# EAGLE board relay driver (EAGLE 7.1.0)
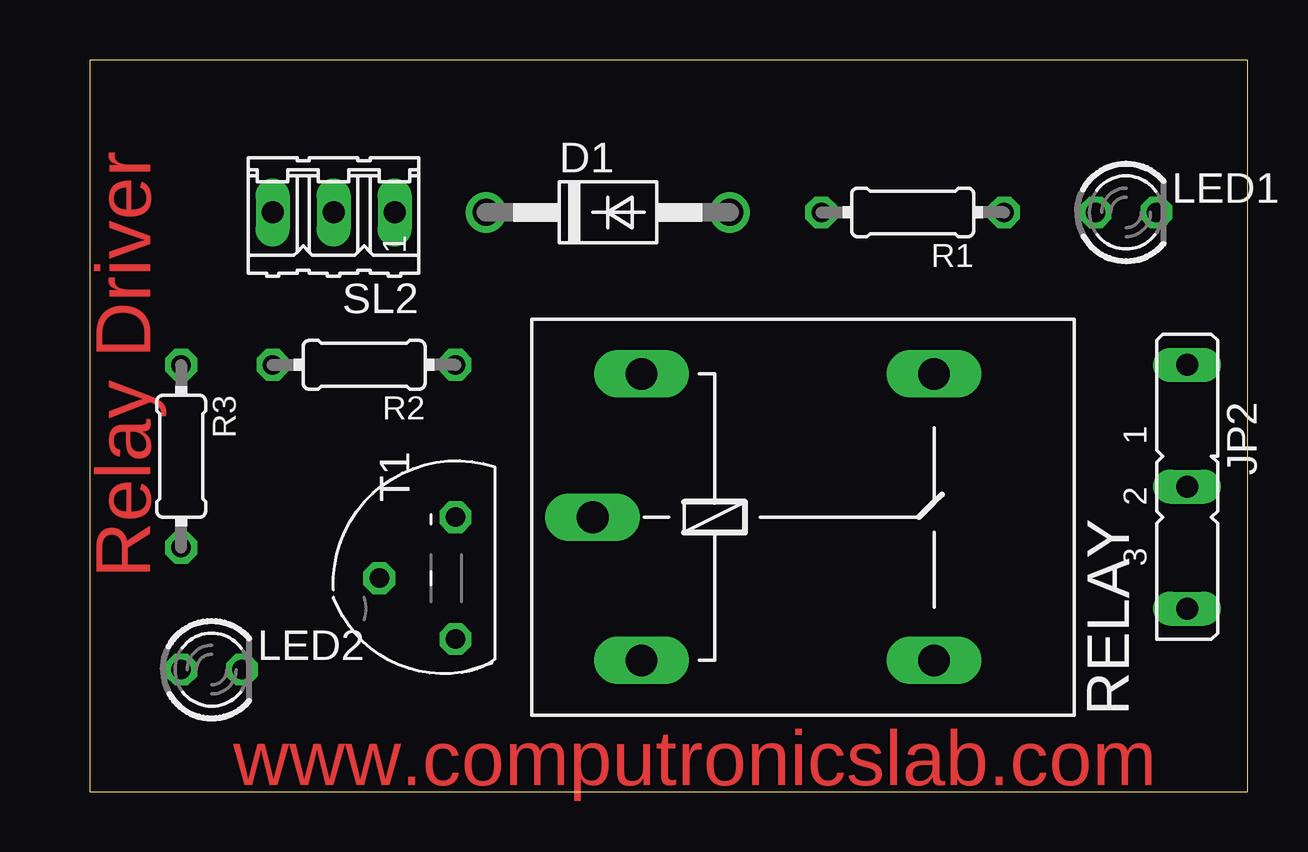
[diagram p0: board, top side]
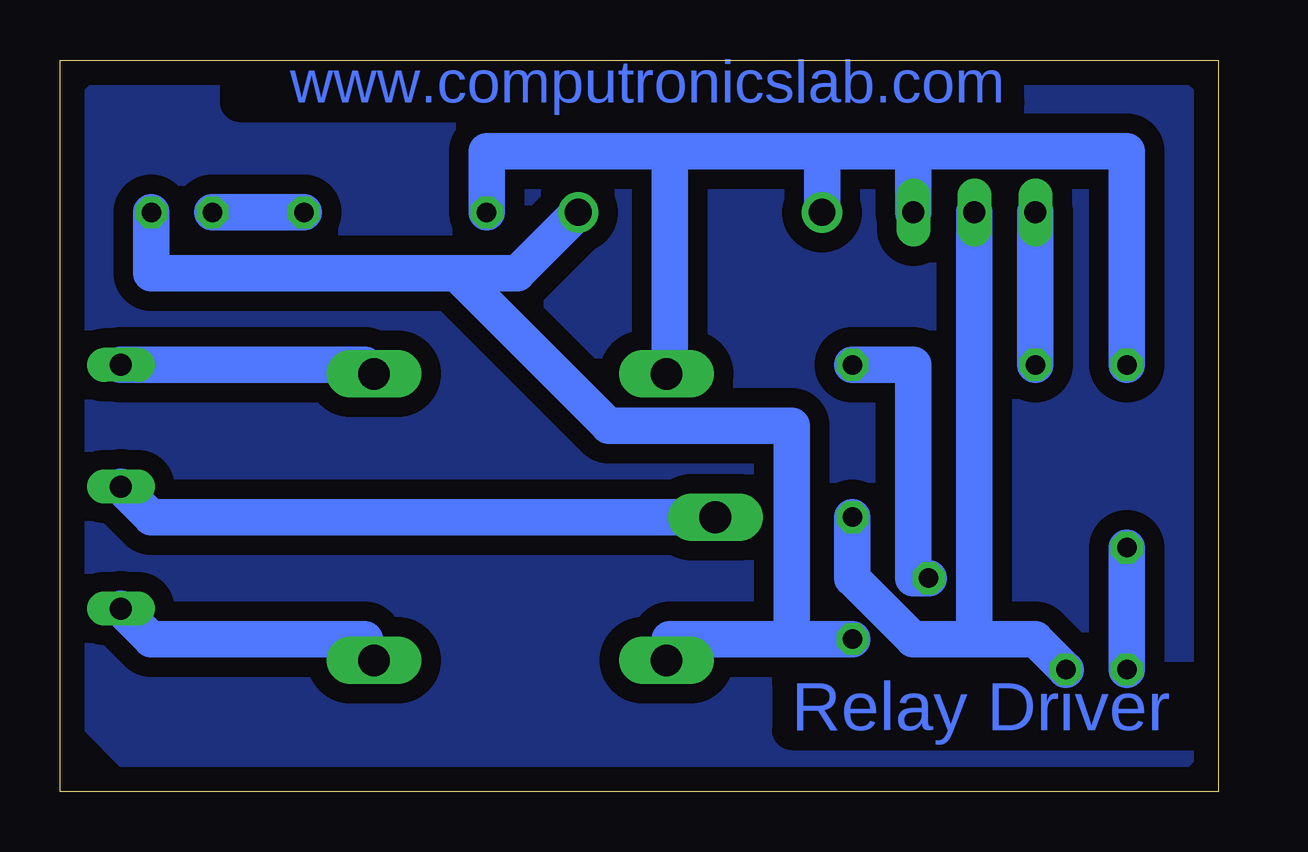
[diagram p1: board, bottom side, seen from below]

Size 48.26 x 30.47 mm. Coordinates in mm from the lower left corner, seen from the top.
Outline: 0,0 48.26,0 48.26,30.47 0,30.47 0,0
Copper layers (1*16): Top 0.035mm / dielectric 1.5mm / Bottom 0.035mm
Design rules "default": minimum track width 60mil, minimum drill 24mil, track to track 8mil, track to pad 8mil, pad to pad 8mil, via to via 8mil, smd to smd 8mil, copper to edge 40mil, drill to drill 8mil, minimum pad ring 10mil, minimum via ring 8mil, stop-mask expansion 4mil, vias tented up to drill 0mil, thermal gap 10mil

## Footprints (pad centres in the part's own frame; a part is rotated, then mirrored left to right if it is on the bottom)
DO41-10 = drill 1.118: A 5.08,0; C -5.08,0
JP2 = drill 0.914 long: 1 -5.08,0; 2 0,0; 3 5.08,0
LED3MM = drill 0.813 octagon: A -1.27,0; K 1.27,0
0204/7 = drill 0.813 octagon: 1 -3.81,0; 2 3.81,0
G5LE = drill 1.321 long: 1 -7.493,-5.969; 2 -7.493,5.969; O 4.699,5.969; P -9.525,0; S 4.699,-5.969
03P = drill 0.914 long: 1 -2.54,0; 2 0,0; 3 2.54,0
TO92 = drill 0.813 octagon: 1 2.54,-1.27; 2 0,1.905; 3 -2.54,-1.27

## Placement (x,y rotation side)
D1  1N4007  [DO41-10]  21.59,24.13 0 top
JP2  [JP2]  45.72,12.7 270 top
LED1  [LED3MM]  43.18,24.13 0 top
LED2  [LED3MM]  5.08,5.08 0 top
R1  330E  [0204/7]  34.29,24.13 180 top
R2  2.2K  [0204/7]  11.43,17.78 180 top
R3  330E  [0204/7]  3.81,13.97 270 top
RELAY  12V  [G5LE]  30.48,11.43 0 top
SL2  [03P]  10.16,24.13 180 top
T1  BC547  [TO92]  13.97,8.89 90 top

## Library data of the parts
D1 = diode
JP2 = jumper
LED1 LED2 = led
R1-R3 = eagle-ltspice; SPICEMODEL: NONE; SPICEPREFIX: R
RELAY = relay; OC_FARNELL: unknown; OC_NEWARK: unknown
SL2 = con-amp-quick; OC_FARNELL: unknown; OC_NEWARK: unknown
T1 = transistor

## Nets
N$1: D1.A LED1.K RELAY.1 T1.3
N$2: JP2.2 RELAY.P
N$3: LED1.A R1.1
N$4: R2.1 T1.2
N$5: LED2.K SL2.2 T1.1
N$6: D1.C R1.2 R3.1 RELAY.2 SL2.1
N$7: R2.2 SL2.3
N$8: JP2.3 RELAY.S
N$9: LED2.A R3.2
N$10: JP2.1 RELAY.O

## Tracks (layer width: path | path; a pad name or v marks a point on that pad's centre or on a via)
N$1
  Bottom 1.524: 17.78,6.35 22.86,6.35 RELAY.1 | 17.78,6.35 T1.3 | LED1.K 44.45,21.59 31.75,21.59 | 31.75,21.59 29.21,21.59 D1.A | 17.78,6.35 17.78,15.24 25.4,15.24 31.75,21.59
N$2
  Bottom 1.524: JP2.2 44.45,11.43 21.59,11.43 RELAY.P
N$3
  Bottom 1.524: LED1.A R1.1
N$4
  Bottom 1.524: R2.1 12.7,17.78 12.7,8.89 T1.2
N$5
  Bottom 1.524: LED2.K 7.62,6.35 10.16,6.35 | 10.16,6.35 12.7,6.35 15.24,8.89 T1.1 | 10.16,6.35 SL2.2
N$6
  Bottom 1.524: R3.1 3.81,26.67 12.7,26.67 | 16.51,26.67 12.7,26.67 | D1.C 16.51,26.67 | R1.2 30.48,26.67 22.86,26.67 | 16.51,26.67 22.86,26.67 | 12.7,26.67 SL2.1 | 22.86,26.67 22.86,17.78 RELAY.2
N$7
  Bottom 1.524: SL2.3 R2.2
N$8
  Bottom 1.524: JP2.3 44.45,6.35 35.56,6.35 RELAY.S
N$9
  Bottom 1.524: R3.2 LED2.A
N$10
  Bottom 1.524: JP2.1 35.56,17.78 RELAY.O
N$11
  pour Bottom (isolate 0.813): 2.54,0 0,2.54 0,27.94 2.54,30.48 45.72,30.48 48.26,27.94 48.26,3.81 44.45,0

## Text on the board
Top: Relay Driver | www.computronicslab.com
Bottom: www.computronicslab.com | Relay Driver